# EAGLE board nixie-in2 (EAGLE 5.04)
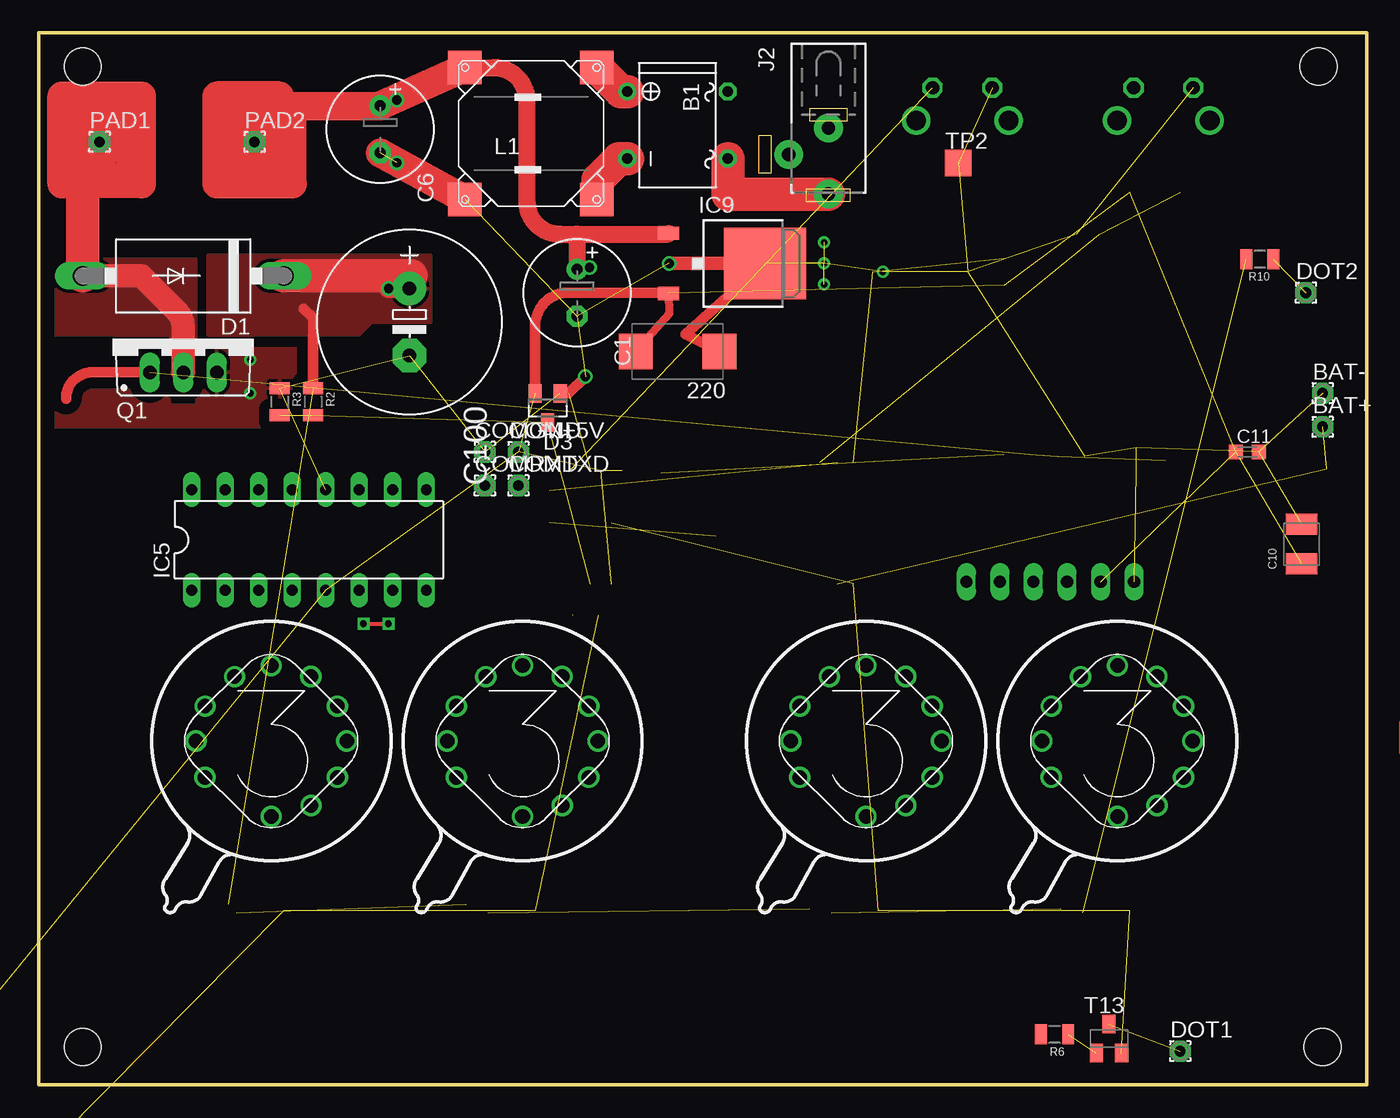
[diagram p0: board, top side]
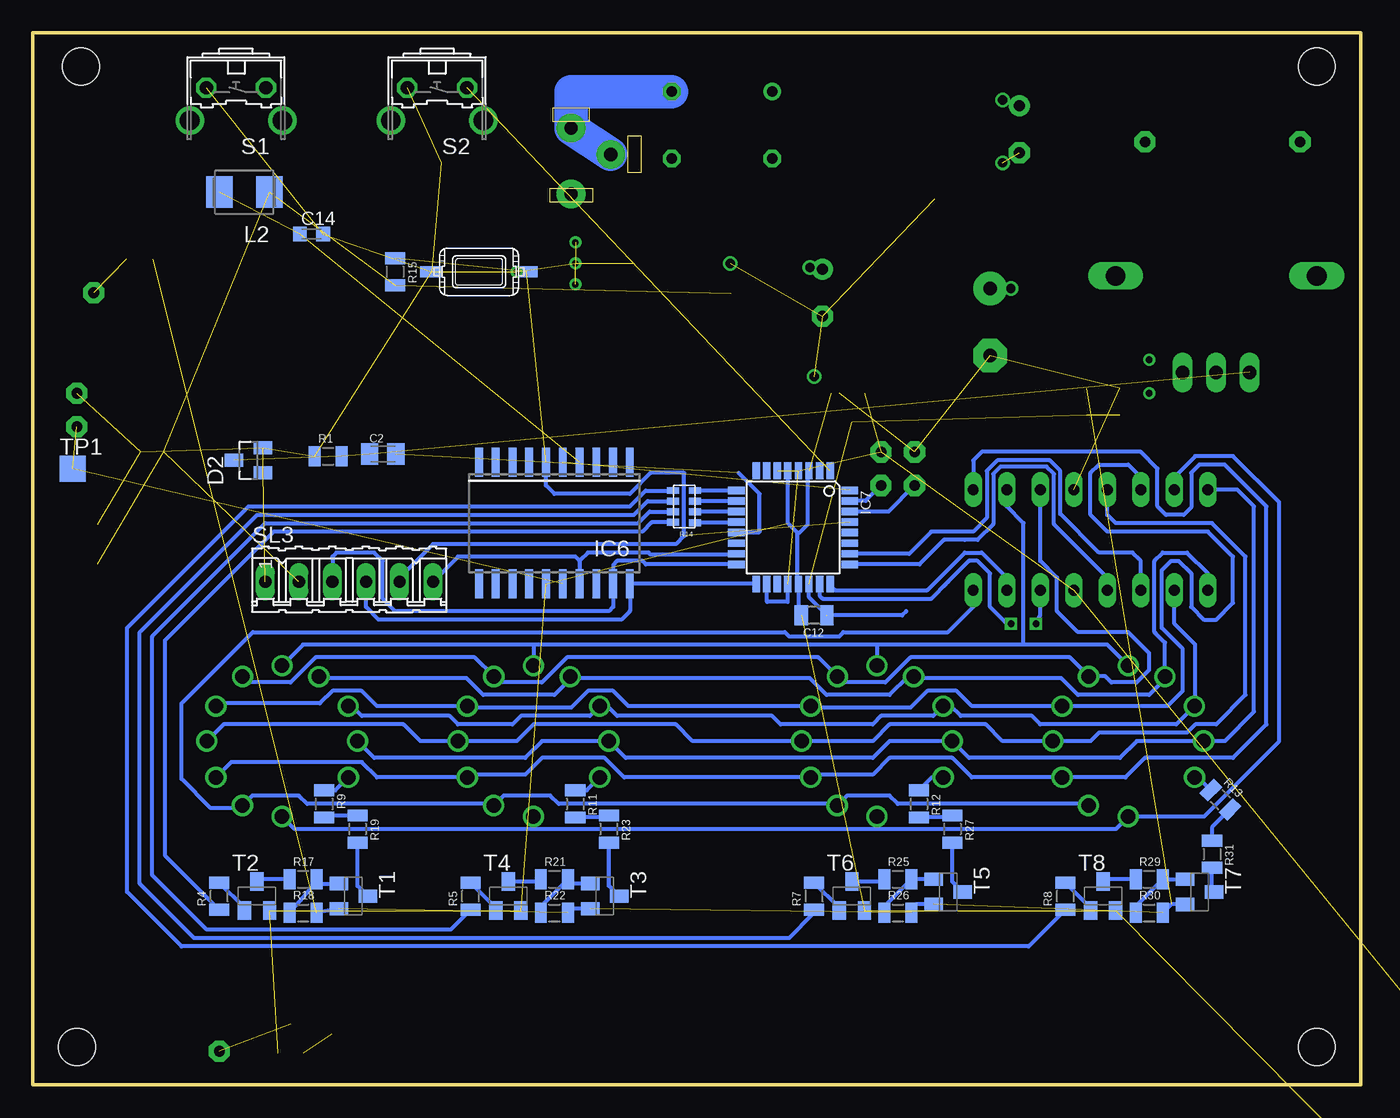
[diagram p1: board, bottom side, seen from below]

Size 100.64 x 79.68 mm. Coordinates in mm from the lower left corner, seen from the top.
Outline: 0,0 100.64,0 100.64,79.68 0,79.68 0,0
Copper layers (1*16): Top 0.035mm / dielectric 1.5mm / Bottom 0.035mm
Design rules "default *": minimum track width 10mil, minimum drill 24mil, track to track 10mil, track to pad 10mil, pad to pad 8mil, via to via 8mil, smd to smd 8mil, copper to edge 40mil, drill to drill 8mil, minimum pad ring 10mil, minimum via ring 8mil, stop-mask expansion 4mil, vias tented up to drill 0mil, thermal gap 10mil
Holes 2.8 mm at 3.33,2.85 3.33,77.15 96.99,77.15 97.31,2.85
tRestrict: area 5.6,65.1 to 18.6,78.1; area 72.9,35.2 to 78.9,40.3; area 64.3,30.2 to 84.6,32.7
bRestrict: area 0.2,63.8 to 22.7,79.4; area 85.9,46.7 to 89.4,52.7; 4 lines

## Footprints (pad centres in the part's own frame; a part is rotated, then mirrored left to right if it is on the bottom)
D/7343-31R = smd 2.55 x 2.7: + 3.175,0; - -3.175,0
B-DIL = drill 0.813 round: + -2.54,-3.81 | drill 0.813 octagon: - 2.54,-3.81; AC1 2.54,3.81; AC2 -2.54,3.81
1,6/0,8 = drill 0.813 pad 1.6 octagon: 1 0,0
E3,5-8 = drill 0.813 pad 1.6 round: + -1.778,0 | drill 0.813 pad 1.6 octagon: - 1.778,0
C0805K = smd 1.3 x 1.6: 1 -1,0; 2 1,0
SMC_B = smd 1.6 x 2.4: + -1.5,0; - 1.5,0
C0603K = smd 1.05 x 1.08: 1 -0.875,0; 2 0.875,0
C0805S = smd 1.016 x 1.524: 1 -0.977,0; 2 0.977,0
E5-13 = drill 1.016 pad 2.54 round: + -2.54,0 | drill 1.016 pad 2.54 octagon: - 2.54,0
DO201-15 = drill 1.499 long: A 7.62,0; C -7.62,0
SOT23 = smd 1 x 1.4: 1 -0.95,-1.1; 2 0.95,-1.1; 3 0,1.1
SOT23@1 = smd 1 x 1.4: 1 -0.95,-1.1; 2 0.95,-1.1; 3 0,1.1
DIL16 = drill 0.813 long: 1 -8.89,-3.81; 2 -6.35,-3.81; 3 -3.81,-3.81; 4 -1.27,-3.81; 5 1.27,-3.81; 6 3.81,-3.81; 7 6.35,-3.81; 8 8.89,-3.81; 9 8.89,3.81; 10 6.35,3.81; 11 3.81,3.81; 12 1.27,3.81; 13 -1.27,3.81; 14 -3.81,3.81; 15 -6.35,3.81; 16 -8.89,3.81
SO-20DW = smd 0.6 x 2.2: 1 -5.715,-4.6; 2 -4.445,-4.6; 3 -3.175,-4.6; 4 -1.905,-4.6; 5 -0.635,-4.6; 6 0.635,-4.6; 7 1.905,-4.6; 8 3.175,-4.6; 9 4.445,-4.6; 10 5.715,-4.6; 11 5.715,4.6; 12 4.445,4.6; 13 3.175,4.6; 14 1.905,4.6; 15 0.635,4.6; 16 -0.635,4.6; 17 -1.905,4.6; 18 -3.175,4.6; 19 -4.445,4.6; 20 -5.715,4.6
TQFP32-08 = smd 1.27 x 0.559: 1 -4.293,2.8; 2 -4.293,2; 3 -4.293,1.2; 4 -4.293,0.4; 5 -4.293,-0.4; 6 -4.293,-1.2; 7 -4.293,-2; 8 -4.293,-2.8; 17 4.293,-2.8; 18 4.293,-2; 19 4.293,-1.2; 20 4.293,-0.4; 21 4.293,0.4; 22 4.293,1.2; 23 4.293,2; 24 4.293,2.8 | smd 0.559 x 1.27: 9 -2.8,-4.293; 10 -2,-4.293; 11 -1.2,-4.293; 12 -0.4,-4.293; 13 0.4,-4.293; 14 1.2,-4.293; 15 2,-4.293; 16 2.8,-4.293; 25 2.8,4.293; 26 2,4.293; 27 1.2,4.293; 28 0.4,4.293; 29 -0.4,4.293; 30 -1.2,4.293; 31 -2,4.293; 32 -2.8,4.293
TO252 = smd 1 x 1.6: 1 -2.28,-4.8; 2 2.28,-4.8 | smd 5.4 x 6.2: 3 0,2.5
DCJ-SMALL = drill 1 pad 2.184 round: 1 0,3; 2 3,0; 3 0,-2
WE-SL2_74422... = smd 2.54 x 2.54: A1 -5,5; A2 5,5; B1 -5,-5; B2 5,-5
L4532M = smd 2 x 2.4: 1 -1.9,0; 2 1.9,0
IN-2 = drill 1.1 round: 0 -5.715,0; 1 0,-5.715; 2 3.016,-4.889; 3 5.02,-2.75; 4 5.715,0; 5 5.012,2.643; 6 3,4.897; 7 0,5.715; 8 -2.778,4.881; 9 -5.012,2.643; A -5.02,-2.75
TO220BV = drill 1.016 long: D 0,-2.54; G -2.54,-2.54; S 2.54,-2.54
R0805-SVO = smd 0.9 x 1.524: 1 -1.027,0; 2 1.027,0
RESSMD-YC16 = smd 0.508 x 0.914: R1$1 -1.23,-0.821; R1$2 -1.2,0.851; R2$1 -0.4,-0.821; R2$2 -0.4,0.851; R3$1 0.4,-0.821; R3$2 0.4,0.851; R4$1 1.2,-0.821; R4$2 1.2,0.851
B3F-31XX = drill 1.016 octagon: 1 -2.261,-1.245; 2 2.261,-1.245 | drill 1.499 pad 2.159 round: 3 -3.505,1.245; 4 3.505,1.245
06P = drill 0.914 long: 1 -6.35,0; 2 -3.81,0; 3 -1.27,0; 4 1.27,0; 5 3.81,0; 6 6.35,0
SW_IT1181 = smd 1.676 x 0.813: P$1 -3.61,0; P$2 3.61,0
SOT23-BEC = smd 1 x 1.4: B -0.95,-1.1; C 0,1.1; E 0.95,-1.1
TP20SQ = smd 2 x 2: TP 0,0

## Placement (x,y rotation side)
220  [D/7343-31R]  48.41,55.56 180 top
B1  [B-DIL]  48.41,72.7 270 top
BAT+  [1,6/0,8]  97.31,49.84 0 top
BAT-  [1,6/0,8]  97.31,52.38 0 top
C1  100/24V  [E3,5-8]  40.79,60 270 top
C2  33nF  [C0805K]  74.13,47.78 0 bottom
C5  10uF  [SMC_B]  -92.24,-100.33 0 top  (outside the outline)
C6  100/24V  [E3,5-8]  25.87,72.39 270 top
C9  10uF  [SMC_B]  -97.32,-100.33 0 top  (outside the outline)
C10  10uF  [SMC_B]  95.72,40.95 90 top
C11  100nF  [C0603K]  91.59,47.94 0 top
C12  1.0  [C0805S]  41.43,35.55 180 bottom
C13  100nF  [C0603K]  -96.05,-107.95 0 top  (outside the outline)
C14  100nF  [C0603K]  79.53,64.45 0 bottom
C15  100nF  [C0603K]  -96.05,-113.03 0 top  (outside the outline)
C100  10uF/250V  [E5-13]  28.09,57.78 270 top
COM+5V  [1,6/0,8]  36.35,47.94 0 top
COMGND  [1,6/0,8]  33.81,47.94 0 top
COMRXD  [1,6/0,8]  33.81,45.4 0 top
COMTXD  [1,6/0,8]  36.35,45.4 0 top
D1  31DF6  [DO201-15]  10.95,61.27 180 top
D2  BAT54C  [SOT23]  84.29,47.3 90 bottom
D3  BAT54S  [SOT23@1]  38.57,51.27 180 top
DOT1  [1,6/0,8]  86.51,2.54 0 top
DOT2  [1,6/0,8]  96.04,60 0 top
IC5  74141N  [DIL16]  20.47,41.27 0 top
IC6  DS3234  [SO-20DW]  61.11,42.54 180 bottom
IC7  MEGA8-AI  [TQFP32-08]  43.02,42.22 270 bottom
IC9  7805DT  [TO252]  52.54,62.23 270 top
J2  [DCJ-SMALL]  59.84,70.48 180 top
L1  CHOKE-510-1010  [WE-SL2_74422...]  37.3,72.07 180 top
L2  [L4532M]  84.61,67.62 180 bottom
N1  IN-2  [IN-2]  81.75,26.03 0 top
N2  IN-2  [IN-2]  62.7,26.03 0 top
N3  IN-2  [IN-2]  36.66,26.03 0 top
N4  IN-2  [IN-2]  17.61,26.03 0 top
PAD1  [1,6/0,8]  4.6,71.43 0 top
PAD2  [1,6/0,8]  16.34,71.43 0 top
Q1  IRF630N  [TO220BV]  10.95,56.51 0 top
R1  91K  [R0805-SVO]  78.26,47.62 0 bottom
R2  470K  [R0805-SVO]  20.79,51.75 270 top
R3  4K7  [R0805-SVO]  18.25,51.75 270 top
R4  1K  [R0805-SVO]  86.51,14.28 90 bottom
R5  1K  [R0805-SVO]  67.46,14.28 90 bottom
R6  1K  [R0805-SVO]  76.99,3.8 180 top
R7  1K  [R0805-SVO]  41.43,14.28 90 bottom
R8  1K  [R0805-SVO]  22.38,14.28 90 bottom
R9  33K  [R0805-SVO]  78.58,21.27 270 bottom
R10  1K2  [R0805-SVO]  92.55,62.54 180 top
R11  33K  [R0805-SVO]  59.52,21.27 270 bottom
R12  33K  [R0805-SVO]  33.49,21.27 270 bottom
R13  33K  [R0805-SVO]  10.63,21.59 315 bottom
R14  [RESSMD-YC16]  51.27,43.81 90 bottom
R15  10K  [R0805-SVO]  73.18,61.59 270 bottom
R17  100K  [R0805-SVO]  80.16,15.55 0 bottom
R18  2.4K  [R0805-SVO]  80.16,13.01 0 bottom
R19  33K  [R0805-SVO]  76.03,19.36 270 bottom
R21  100K  [R0805-SVO]  61.11,15.55 0 bottom
R22  2.4K  [R0805-SVO]  61.11,13.01 0 bottom
R23  33K  [R0805-SVO]  56.98,19.36 270 bottom
R25  100K  [R0805-SVO]  35.08,15.55 0 bottom
R26  2.4K  [R0805-SVO]  35.08,13.01 0 bottom
R27  33K  [R0805-SVO]  30.95,19.36 270 bottom
R29  100K  [R0805-SVO]  16.03,15.55 0 bottom
R30  2.4K  [R0805-SVO]  16.03,13.01 0 bottom
R31  33K  [R0805-SVO]  11.27,17.46 270 bottom
S1  [B3F-31XX]  85.24,74.29 180 bottom
S2  [B3F-31XX]  70,74.29 180 bottom
SL3  [06P]  76.67,38.09 0 bottom
SW1  BUTTON-IT_1181  [SW_IT1181]  66.83,61.59 0 bottom
T1  BTA92  [SOT23-BEC]  76.35,14.28 270 bottom
T2  BTA42  [SOT23-BEC]  83.66,14.28 0 bottom
T3  BTA92  [SOT23-BEC]  57.3,14.28 270 bottom
T4  BTA42  [SOT23-BEC]  64.61,14.28 0 bottom
T5  BTA92  [SOT23-BEC]  31.27,14.6 270 bottom
T6  BTA42  [SOT23-BEC]  38.57,14.28 0 bottom
T7  BTA92  [SOT23-BEC]  12.22,14.6 270 bottom
T8  BTA42  [SOT23-BEC]  19.52,14.28 0 bottom
T13  BTA42  [SOT23-BEC]  81.11,3.49 0 top
TP1  TPSTP20SQ  [TP20SQ]  97.62,46.67 0 bottom
TP2  TPSTP20SQ  [TP20SQ]  69.69,69.84 0 top

## Library data of the parts
220 C1 C2 C5 C6 C9-C15 C100 L2 R1-R13 R15 R17-R19 R21-R23 R25-R27 R29-R31 = rcl
B1 = rectifier
BAT+ BAT- COM+5V COMGND COMRXD COMTXD DOT1 DOT2 PAD1 PAD2 = wirepad
D1-D3 = diode
IC5 = 74xx-eu
IC6 = 0-ds3234
IC7 = atmel
IC9 = linear
J2 L1 R14 SW1 TP1 TP2 = 0-svo
N1-N4 = 0-nixies-russian
Q1 = transistor-power
S1 S2 = switch-omron
SL3 = con-amp-quick
T1-T8 T13 = transistor

## Nets
+5V: 220.+ C5.- C9.- C10.+ C11.1 C13.2 C15.2 COM+5V.1 D3.2 IC5.5 IC7.4 IC7.6 IC7.18 IC7.20 IC9.2 L2.1 R15.2 SL3.2
+UB: C1.+ C6.+ IC9.1 L1.B2 PAD2.1
BTN+: S1.1
BTNSET: IC7.1 S2.1
C0: IC5.16 N1.0 N2.0 N3.0 N4.0
C1: IC5.15 N1.1 N2.1 N3.1 N4.1
C2: IC5.8 N1.2 N2.2 N3.2 N4.2
C3: IC5.9 N1.3 N2.3 N3.3 N4.3
C4: IC5.13 N1.4 N2.4 N3.4 N4.4
C5: IC5.14 N1.5 N2.5 N3.5 N4.5
C6: IC5.11 N1.6 N2.6 N3.6 N4.6
C7: IC5.10 N1.7 N2.7 N3.7 N4.7
C8: IC5.1 N1.8 N2.8 N3.8 N4.8
C9: IC5.2 N1.9 N2.9 N3.9 N4.9
D0: IC5.3 IC7.26
D1: IC5.6 IC7.23
D2: IC5.7 IC7.24
D3: IC5.4 IC7.25
DOT: R6.2
FBACK: C12.1 D3.3 IC7.22 R2.2 R3.2
GND: 220.- BAT-.1 C1.- C5.+ C6.- C9.+ C10.- C11.2 C12.2 C13.1 C14.2 C15.1 C100.- COMGND.1 D2.1 D2.2 D3.1 IC5.12 IC6.15 IC7.3 IC7.5 IC7.21 IC9.3 L1.A2 Q1.S R1.1 R3.1 S1.2 S2.2 SL3.1 SW1.P$1 T2.E T4.E T6.E T8.E T13.E TP2.TP
HV+: C100.+ D1.C R2.1 R10.2 R18.2 R22.2 R26.2 R30.2 T1.E T3.E T5.E T7.E
HVPUMP: C2.2 IC7.13
MISO: IC6.19 IC7.16 SL3.3
MOSI: IC6.17 IC7.15 SL3.6
N$1: DOT2.1 R10.1
N$2: IC6.18
N$3: C2.1 D2.3 Q1.G R1.2
N$4: R4.2 T2.B
N$5: R19.2 T1.C
N$6: N1.A R9.1
N$7: D1.A PAD1.1 Q1.D
N$8: R5.2 T4.B
N$9: BAT+.1 IC6.16 TP1.TP
N$10: R9.2 R19.1
N$11: R21.2 R22.1 T3.B
N$12: R21.1 T4.C
N$13: R23.2 T3.C
N$14: N2.A R11.1
N$15: R7.2 T6.B
N$16: R25.2 R26.1 T5.B
N$17: R25.1 T6.C
N$18: R27.2 T5.C
N$19: R11.2 R23.1
N$20: R8.2 T8.B
N$21: R6.1 T13.B
N$22: R29.2 R30.1 T7.B
N$23: R29.1 T8.C
N$24: R31.2 T7.C
N$25: B1.+ L1.B1
N$26: R17.2 R18.1 T1.B
N$27: N3.A R12.1
N$28: R12.2 R27.1
N$29: N4.A R13.1
N$30: R13.2 R31.1
N$31: IC7.11 R14.R2$1
N$32: IC7.10 R14.R3$1
N$33: B1.- L1.A1
N$34: IC7.9 R14.R4$1
N$35: IC7.12 R14.R1$1
N$39: R17.1 T2.C
N$51: DOT1.1 T13.C
N$53: C14.1 IC6.4 L2.2
N$64: B1.AC2 J2.2 J2.3
N$65: B1.AC1 J2.1
RESET#: IC6.6 IC7.29 R15.1 SL3.5 SW1.P$2
RTCINT: IC6.5 IC7.32
RTCSEL#: IC6.1
RXD: COMRXD.1 IC7.30
SA1: R4.1 R14.R1$2
SA2: R5.1 R14.R2$2
SA3: R7.1 R14.R3$2
SA4: R8.1 R14.R4$2
SCK: IC6.20 IC7.17 SL3.4
TXD: COMTXD.1 IC7.31

## Tracks (layer width: path | path; a pad name or v marks a point on that pad's centre or on a via)
+5V  (14 unrouted)
  Top 0.61: 220.+ 47.78,58.41 IC9.2
  Top 0.813: IC9.2 47.68,60 40.12,60 arc90 37.62,57.5 D3.2
  Bottom 0.305: IC7.18 45,37.91 45,36.59 43.41,36.59 IC7.20
+UB  (via drill 0.7)
  Top 0.61: C6.+ v27.14,74.61
  Top 0.8: C1.+ v41.74,61.91
  Top 0.813: C6.+ 26.19,74.61
  Top 1.27: L1.B2 34.48,77.07 arc-90 36.98,74.57 36.98,66.95 arc90 39.48,64.45 40.79,64.45 | 40.79,64.45 47.68,64.45 IC9.1 | 18.25,69.21 15.08,69.21 15.08,73.97 16.34,74.29 | 40.79,64.45 C1.+
  Top 2.184: 18.25,69.21 18.25,74.92 13.49,74.92 13.49,68.26 19.2,68.26 19.2,74.13 C6.+ L1.B2 | 16.34,74.29 PAD2.1 16.34,69.53
BTNSET  (1 unrouted)
C0
  Bottom 0.305: N1.0 74.77,24.76 63.34,24.76 62.06,26.03 N2.0 55.71,24.76 36.98,24.76 35.71,26.03 N3.0 29.68,24.76 18.25,24.76 16.98,26.03 N4.0 10.31,26.03 8.09,28.25 8.09,43.81 9.36,45.08 IC5.16
C1
  Bottom 0.305: N1.1 80.8,19.36 62.7,19.36 | 36.66,19.36 18.57,19.36 N4.1 11.9,20.32 6.18,26.03 6.18,44.13 9.68,47.62 12.54,47.62 14.12,46.03 IC5.15 | 36.66,19.36 62.7,19.36 | 36.66,19.36 N3.1 | 62.7,19.36 N2.1
C2
  Bottom 0.305: IC5.8 29.36,36.19 31.27,34.29 39.2,34.29 39.52,33.97 43.33,33.97 43.65,34.29 83.97,34.29 89.37,28.89 89.37,23.17 87.15,20.95 84.96,20.95 N1.2 84,21.9 80.48,21.9 79.84,21.27 65.84,21.27 N2.2 64.95,21.9 61.43,21.9 60.8,21.27 39.81,21.27 N3.2 38.92,21.9 35.71,21.9 35.08,21.27 21.19,21.27 21.06,21.14 N4.2
C3
  Bottom 0.305: N1.3 85.61,24.44 75.72,24.44 74.55,23.28 N2.3 67.51,23.49 63.34,23.49 62.06,24.76 57.3,24.76 55.82,23.28 N3.3 41.48,23.49 36.98,23.49 35.71,24.76 30.95,24.76 29.47,23.28 N4.3 17.82,23.28 16.34,24.76 9.68,24.76 7.14,27.3 7.14,43.81 10.31,46.98 12.22,46.98 12.85,46.35 12.85,43.73 13.41,43.17 14.76,43.17 15.39,43.81 15.39,46.67 16.66,47.94 28.73,47.94 29.36,47.3 IC5.9
C4
  Bottom 0.305: N1.4 86.19,27.3 72.54,27.3 71.27,26.03 N2.4 63.97,26.03 62.7,27.3 51.91,27.3 50.63,26.03 N3.4 36.98,26.03 35.71,27.3 28.41,27.3 27.14,26.03 N4.4 20.47,26.03 19.84,26.66 13.17,26.66 12.54,27.3 10.95,27.3 8.73,29.52 8.73,40 11.27,42.54 18.57,42.54 19.2,43.17 IC5.13
C5
  Bottom 0.305: N1.5 86.55,28.89 78.89,28.89 77.94,29.84 75.72,29.84 74.55,28.67 N2.5 67.61,28.57 59.84,28.57 58.57,29.84 56.67,29.84 55.5,28.67 N3.5 41.57,28.57 34.12,28.57 32.85,29.84 30.63,29.84 29.46,28.67 N4.5 14.65,28.67 13.49,29.84 13.49,33.02 15.08,34.6 15.08,38.97 14.36,39.68 13.81,39.68 12.85,38.73 12.85,36.19 11.9,35.24 10.95,35.24 9.68,36.51 9.68,40 11.58,41.91 19.2,41.91 20.47,43.17 20.47,46.35 19.84,46.98 17.61,46.98 16.66,46.03 IC5.14
C6
  Bottom 0.305: N1.6 84.3,30.48 81.11,30.48 79.21,32.38 67.14,32.38 N2.6 65.25,30.48 62.06,30.48 60.16,32.38 41.11,32.38 N3.6 39.21,30.48 36.03,30.48 34.12,32.38 22.06,32.38 22.06,32.37 N4.6 19.34,30.93 18.88,30.48 16.98,30.48 16.03,31.43 16.03,32.7 17.61,34.29 21.42,34.29 23.01,35.87 23.01,38.41 24.28,39.68 IC5.11
C7
  Bottom 0.305: N1.7 80.16,33.33 62.7,33.33 | 25.55,33.33 19.2,33.33 N4.7 | 25.55,33.33 36.66,33.33 | 36.66,33.33 62.7,33.33 | 36.66,33.33 N3.7 | 62.7,33.33 N2.7 | IC5.10 26.82,43.81 25.55,42.54 25.55,33.33
C8
  Bottom 0.305: N1.8 78.85,30.79 67.78,30.79 66.51,29.52 61.11,29.52 59.92,30.71 N2.8 59.8,30.79 41.74,30.79 40.48,29.52 35.71,29.52 34.32,30.91 N3.8 33.77,30.79 22.7,30.79 21.42,29.52 16.03,29.52 14.84,30.71 N4.8 14.84,33.49 15.55,34.21 | IC5.1 11.58,38.73 13.17,40.32 15,40.32 15.63,39.68 15.63,34.29 15.55,34.21 | 15.55,34.21
C9
  Bottom 0.305: N1.9 76.46,28.67 75.72,27.94 69.05,27.94 68.41,27.3 64.29,27.3 63.65,27.94 58.43,27.94 N2.9 57.09,28.67 56.35,27.94 44.6,27.94 43.97,27.3 36.98,27.3 36.35,27.94 32.39,27.94 N3.9 31.05,28.67 30.31,27.94 24.92,27.94 24.28,27.3 13.98,27.3 N4.9 12.54,28.74 12.54,33.33 14.12,34.92 IC5.2
D0
  Bottom 0.305: IC5.3 16.66,39.68 17.3,40.32 19.84,40.32 22.77,43.25 22.77,46.51 23.57,47.3 27.54,47.3 28.33,46.51 28.33,42.94 29.36,41.91 32.54,41.91 34.22,40.22 IC7.26
D1  (via drill 0.5)
  Top 0.305: v24.6,34.92 v26.5,34.92
  Bottom 0.305: IC5.6 24.28,35.55 v24.6,34.92 | v26.5,34.92 26.82,34.92 28.09,36.19 28.09,38.73 29.04,39.68 29.68,39.68 31.27,38.09 | 31.27,38.09 31.58,37.78 | IC7.23 41.02,37.05 40.79,36.83 32.54,36.83 31.27,38.09
D2
  Bottom 0.305: IC5.7 26.82,38.41 28.73,40.32 30,40.32 32.85,37.46 39.84,37.46 40.21,37.84 IC7.24
D3
  Bottom 0.305: IC5.4 19.2,38.41 23.25,42.46 23.25,46.27 23.81,46.83 27.3,46.83 27.85,46.27 27.85,42.46 29.04,41.27 30,41.27 31.58,41.27 33.43,39.42 IC7.25
FBACK  (4 unrouted)
  Bottom 0.305: IC7.22 41.81,36.92 C12.1 | 40.48,35.55 34.76,35.55 34.44,35.87
GND  (via drill 0.5, 0.7)  (35 unrouted)
  Top 0.8: D3.1 40.15,52.37 v41.43,53.65
  Top 0.813: IC9.3 49.01,56.87 220.-
  Top 1.016: IC9.3 v47.78,62.23
  Top 2.184: L1.A2 C6.-
  Bottom 0.305: IC7.21 42.7,38.01 42.7,41.83 | 42.7,41.83 43.41,42.54 IC7.5 | IC7.3 41.9,46.43 41.9,42.46 42.54,41.83 42.7,41.83 | IC7.21 42.7,37.85 | IC7.21 42.62,35.77 C12.2
  other vias: 27.14,69.84 59.52,63.81 59.52,60.64 59.52,62.23 63.97,61.59 16.03,54.92 16.03,52.38
  pour Top (isolate 0.813, rank 2): 1.1,61.27 1.1,49.84 21.42,49.84 21.42,61.27
HV+  (via drill 0.7)  (5 unrouted)
  Top 0.8: 20.08,58.81 20.79,58.1 R2.1
  Top 1.422: 28.2,61.27 28.41,61.06 28.41,60.64 C100.+ v26.5,60.32
  Top 2.54: D1.C 28.2,61.27
  Bottom 0.305: R18.2 T1.E | R22.2 60.08,13.33 T3.E | R26.2 33.73,13.65 T5.E | R30.2 14.36,13.65 T7.E
  pour Top (isolate 0.813): 12.85,62.54 12.85,56.83 24.28,56.83 25.23,57.78 29.68,57.78 29.68,62.86 12.85,62.86
HVPUMP  (1 unrouted)
  Bottom 0.305: IC7.13 45.64,41.82 45.55,41.91 45.55,44.76 47.14,46.35
MISO
  Bottom 0.305: IC7.16 54.19,39.42 54.45,39.68 56.35,39.68 56.67,39.37 IC6.19 56.67,36.19 56.98,35.87 73.18,35.87 74.13,36.83 74.13,39.68 74.77,40.32 77.62,40.32 77.94,40 SL3.3
MOSI
  Bottom 0.305: IC7.15 47.37,40.16 53.81,40.16 53.97,40.32 58.57,40.32 59.21,39.68 | 59.21,39.68 IC6.17 | SL3.6 68.41,40 59.52,40 59.21,39.68
N$1  (1 unrouted)
N$3  (3 unrouted)
  Top 0.8: 4.06,53.97 Q1.G
  Top 0.813: 2.06,51.97 arc-90 4.06,53.97
N$4
  Bottom 0.305: T2.B 84.61,13.4 R4.2
N$5
  Bottom 0.305: R19.2 76.03,15.07 T1.C
N$6
  Bottom 0.305: R9.1 77.72,22.29 N1.A
N$7
  Top 1.27: PAD1.1 4.28,71.43 4.28,72.7 5.55,72.7 5.55,70.48 3.64,70.48 3.64,73.66 6.5,73.66 6.5,69.21 2.69,69.21 2.69,74.61 7.77,74.61
  Top 1.778: Q1.D 10.95,57.35 arc45 10.42,58.62 7.77,61.27 D1.A
  Top 2.184: 7.77,74.61 7.77,68.26 1.74,68.26 1.74,74.92 7.77,74.92
  Top 2.54: D1.A 3.33,69.42 arc-45 3.85,70.69 PAD1.1
  pour Top (isolate 0.813): 1.1,62.54 11.9,62.54 11.9,52.38 10,52.7 10,56.83 1.1,56.83
N$8
  Bottom 0.305: R5.2 65.55,13.4 T4.B
N$9  (2 unrouted)
N$10
  Bottom 0.305: R19.1 78.43,20.39 R9.2
N$11
  Bottom 0.305: T3.B 59.77,15.23 R21.2 62.14,13.5 R22.1
N$12
  Bottom 0.305: R21.1 62.31,15.38 T4.C
N$13
  Bottom 0.305: T3.C 56.98,15.07 R23.2
N$14
  Bottom 0.305: R11.1 58.67,22.29 N2.A
N$15
  Bottom 0.305: R7.2 39.52,13.4 T6.B
N$16
  Bottom 0.305: T5.B R25.2 36.1,13.5 R26.1
N$17
  Bottom 0.305: R25.1 36.27,15.38 T6.C
N$18
  Bottom 0.305: T5.C 30.95,15.38 R27.2
N$19
  Bottom 0.305: R11.2 57.13,20.24 R23.1
N$20
  Bottom 0.305: R8.2 20.47,13.4 T8.B
N$21  (1 unrouted)
N$22
  Bottom 0.305: R30.1 17.05,13.5 R29.2 T7.B
N$23
  Bottom 0.305: T8.C 19.35,15.55 R29.1
N$24
  Bottom 0.305: T7.C 11.27,14.75 R31.2
N$25
  Top 2.54: B1.+ 44.12,75.24 L1.B1
N$26
  Bottom 0.305: T1.B 78.82,15.23 R17.2 79.14,15.38 R18.1
N$27
  Bottom 0.305: R12.1 32.5,23.28 N3.A
N$28
  Bottom 0.305: R27.1 31.1,20.24 R12.2
N$29
  Bottom 0.305: R13.1 12.33,23.28 N4.A
N$30
  Bottom 0.305: R13.2 11.27,19.5 R31.1
N$31
  Bottom 0.305: IC7.11 47.32,43.41 R14.R2$1
N$32
  Bottom 0.305: IC7.10 47.32,44.21 R14.R3$1
N$33
  Top 0.813: L1.A1 42.38,67.15
  Top 1.27: 42.38,67.15 42.38,68.58
  Top 2.54: B1.- 43.97,70.16 42.38,68.58
N$34
  Bottom 0.305: IC7.9 47.32,45.01 R14.R4$1
N$35
  Bottom 0.305: IC7.12 47.35,42.58 R14.R1$1
N$39
  Bottom 0.305: R17.1 83.48,15.55 T2.C
N$51  (1 unrouted)
N$53  (2 unrouted)
N$64
  Bottom 2.54: B1.AC2 59.84,75.24 J2.3 J2.2
N$65
  Top 2.54: J2.1 52.22,67.46 B1.AC1
RESET#  (3 unrouted)
  Bottom 0.305: SL3.5 72.86,38.41 70.32,40.95 51.91,40.95 51.27,41.59 51.27,46.35 53.81,46.35 55.4,44.76 61.11,44.76 61.75,45.4 IC6.6
RTCINT  (1 unrouted)
RXD
  Bottom 0.305: IC7.30 35.78,43.42 COMRXD.1
SA1
  Bottom 0.305: R4.1 90.64,17.38 90.64,33.65 82.39,41.91 54.45,41.91 53.74,42.61 R14.R1$2
SA2
  Bottom 0.305: R5.1 68.97,11.74 87.47,11.74 91.59,15.87 91.59,33.97 83.02,42.54 54.76,42.54 53.89,43.41 R14.R2$2
SA3
  Bottom 0.305: R7.1 41.43,13.01 43.33,11.11 88.42,11.11 92.55,15.24 92.55,34.29 83.66,43.17 55.08,43.17 54.05,44.21 R14.R3$2
SA4
  Bottom 0.305: R8.1 25.16,10.47 89.37,10.47 93.5,14.6 93.5,34.6 84.29,43.81 55.4,43.81 54.2,45.01 R14.R4$2
SCK
  Bottom 0.305: IC7.17 45.82,37.94 IC6.20 55.4,35.87 56.03,35.24 74.45,35.24 75.4,36.19 SL3.4
TXD
  Bottom 0.305: IC7.31 37.52,44.22 COMTXD.1

## Text on the board
Top: PATASHNIK
SMD1: 2009